# EAGLE board panda (EAGLE 9.6.2)
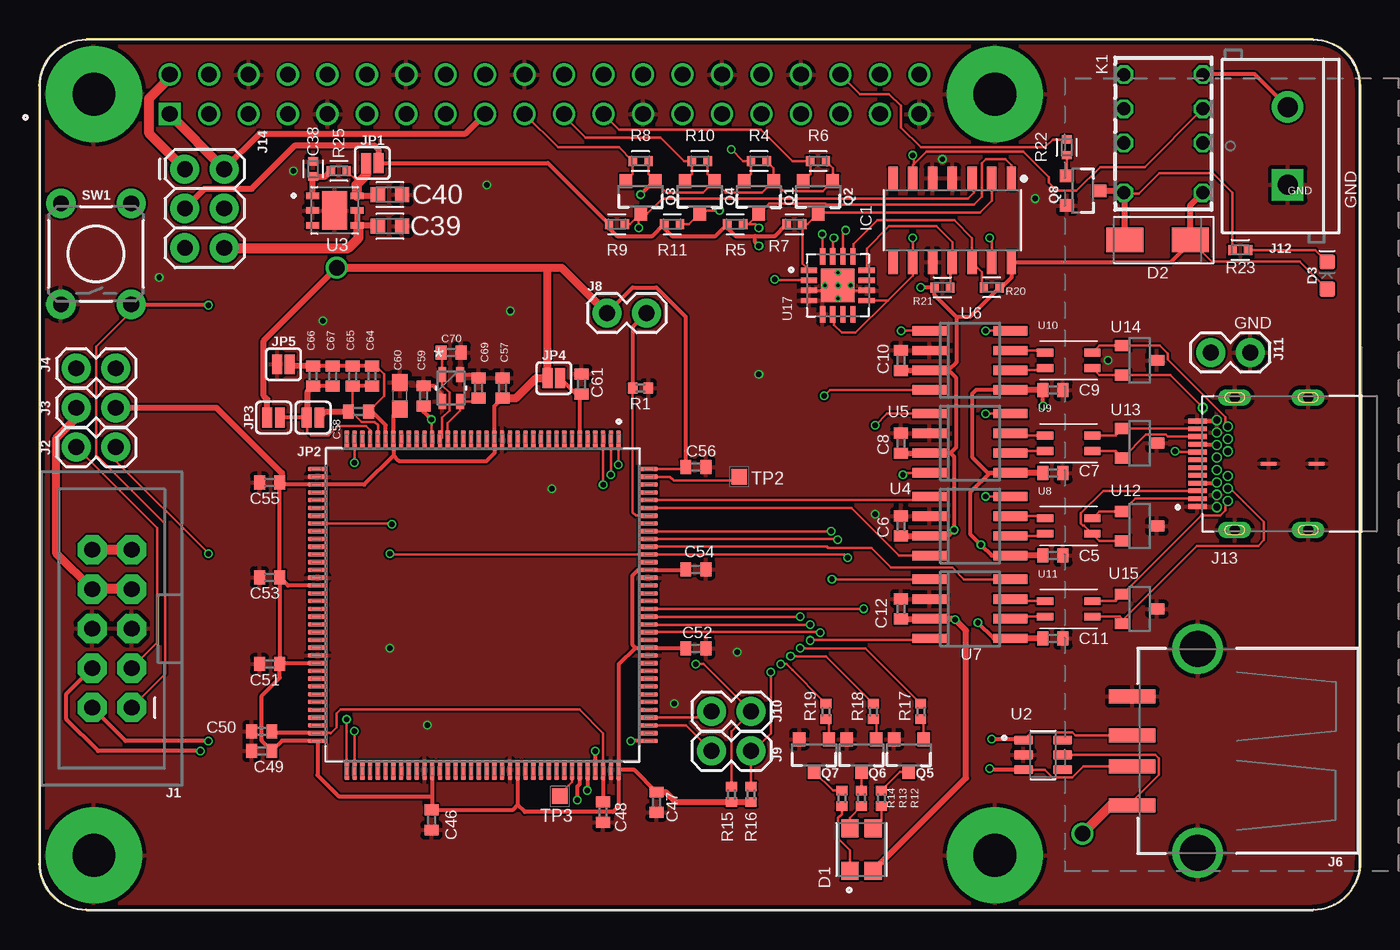
[diagram p0: board, top side]
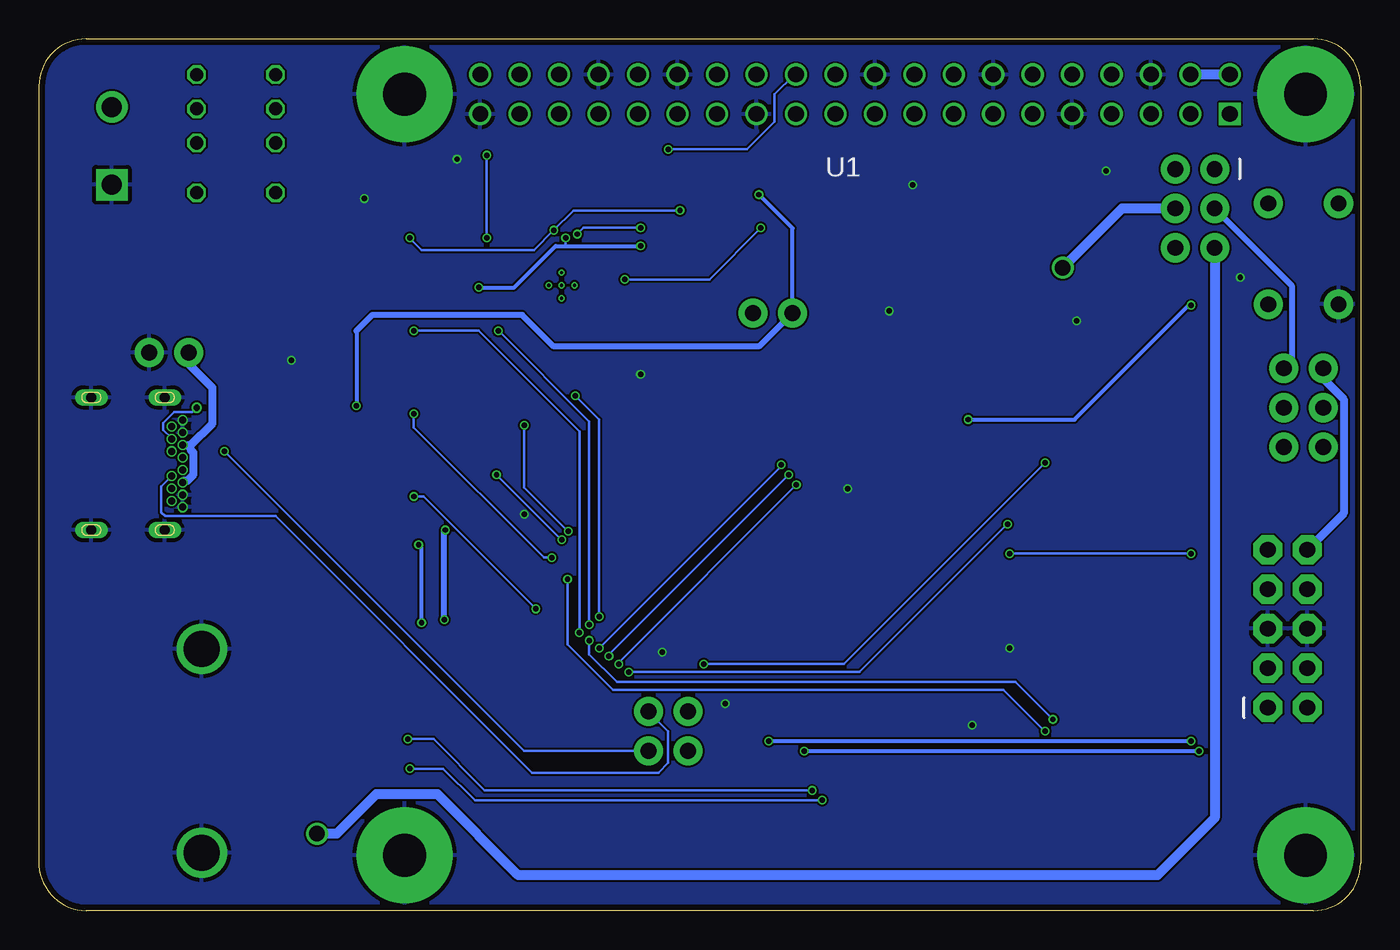
[diagram p1: board, bottom side, seen from below]

Size 85.09 x 56.13 mm. Coordinates in mm from the lower left corner, seen from the top.
Outline: 0,53.09 0,3.05 arc90 3.05,0 82.04,0 arc90 85.09,3.17 85.09,53.09 arc90 82.04,56.13 3.05,56.13 arc90 0,53.09
Copper layers (1*16): Top 0.035mm / dielectric 1.5mm / Bottom 0.035mm
Design rules "default *": minimum track width 6mil, minimum drill 0.1mm, track to track 5mil, track to pad 5mil, pad to pad 5mil, via to via 5mil, smd to smd 5mil, copper to edge 15mil, drill to drill 6mil, minimum pad ring 4mil, minimum via ring 4mil, stop-mask expansion 4mil, vias tented up to drill 0mil, thermal gap 10mil

## Footprints (pad centres in the part's own frame; a part is rotated, then mirrored left to right if it is on the bottom)
C0402 = smd 0.7 x 0.9: 1 -0.65,0; 2 0.65,0
CAPC1005X60 = smd 0.56 x 0.629: 1 -0.485,0; 2 0.485,0
CAPC1608X85 = smd 0.921 x 0.97: 1 -0.775,0; 2 0.775,0
C0603 = smd 1.1 x 1: 1 -0.85,0; 2 0.85,0
LED_CLV1A-FKB-CK1VW1DE1BB7C3C3 = smd 1.15 x 1.1: 1 -1.375,0.75; 2 -1.375,-0.75; 3 1.375,-0.75; 4 1.375,0.75
DIOM5226X290N = smd 2.392 x 1.565: 1 -2.108,0; 2 2.108,0
LED-0603 = smd 1 x 1: A -0.877,0; C 0.877,0
SOIC127P600X175-14N = smd 1.5 x 0.6: 1 -2.7,3.81; 2 -2.7,2.54; 3 -2.7,1.27; 4 -2.7,0; 5 -2.7,-1.27; 6 -2.7,-2.54; 7 -2.7,-3.81; 8 2.7,-3.81; 9 2.7,-2.54; 10 2.7,-1.27; 11 2.7,0; 12 2.7,1.27; 13 2.7,2.54; 14 2.7,3.81
2X5-SHROUDED-NS = drill 1.016 pad 1.88 octagon: 1 -1.27,5.08; 2 1.27,5.08; 3 -1.27,2.54; 4 1.27,2.54; 5 -1.27,0; 6 1.27,0; 7 -1.27,-2.54; 8 1.27,-2.54; 9 -1.27,-5.08; 10 1.27,-5.08
1X02 = drill 1.016 pad 1.88: 1 0,0; 2 2.54,0
USB-A-S-SILK-FEMALE = smd 3 x 0.9: D+ 7.212,-1; D- 7.212,1; GND 7.212,-3.5; VBUS 7.212,3.5 | drill 2.311: SHLD1 3,-6.566; SHLD2 3,6.566
SCREWTERMINAL-5MM-2 = drill 1.3 pad 2.032 square: 1 0,0 | drill 1.3 pad 2.032: 2 5,0
BELFUSE_SS-52400-003 = smd 0.3 x 1.2: A1 -2.75,7.13; A2 -2.25,7.13; A3 -1.75,7.13; A4 -1.25,7.13; A5 -0.75,7.13; A6 -0.25,7.13; A7 0.25,7.13; A8 0.75,7.13; A9 1.25,7.13; A10 1.75,7.13; A11 2.25,7.13; A12 2.75,7.13 | drill 0.45 pad 0.65: B1 2.8,5.88; B2 2.4,5.17; B3 1.6,5.17; B4 1.2,5.88; B5 0.8,5.17; B6 0.4,5.88; B7 -0.4,5.88; B8 -0.8,5.17; B9 -1.2,5.88; B10 -1.6,5.17; B11 -2.4,5.17; B12 -2.8,5.88; G1 2,5.88; G2 -2,5.88 | smd 0.2 x 1: G3 0,2.55; G4 0,-0.55 | drill 0.65 pad 1.05 long: S1 -4.27,4.73; S2 4.27,4.73; S3 -4.27,0; S4 4.27,0
2X3 = drill 1.016 pad 1.88: 1 0,0; 2 0,2.54; 3 2.54,0; 4 2.54,2.54; 5 5.08,0; 6 5.08,2.54
SMT-JUMPER_2_NC_PASTE_SILK = smd 0.635 x 1.27: 1 -0.406,0; 2 0.406,0
G6K-2P-Y = drill 0.85 octagon: 1 0,-2.54; 2 3.2,-2.54; 3 5.4,-2.54; 4 7.6,-2.54; 5 7.6,2.54; 6 5.4,2.54; 7 3.2,2.54; 8 0,2.54
SOT23-3 = smd 0.8 x 0.9: 1 -0.95,-1; 2 0.95,-1; 3 0,1.1
R0402 = smd 0.6 x 0.7: 1 -0.5,0; 2 0.5,0
RESC1005X40 = smd 0.535 x 0.644: 1 -0.507,0; 2 0.507,0
TACTILE_SWITCH_PTH_6.0MM = drill 1.016 pad 1.88: 1 -3.251,2.261; 2 3.251,2.261; 3 -3.251,-2.261; 4 3.251,-2.261
TESTPOINT_SMD-10SN = smd 1 x 1: TP 0,0
MODULE_RASPBERRYPI4_4GB = drill 1.016 square: 1 24.148,-1.256 | drill 1.016: 2 24.148,1.284; 3 21.608,-1.256; 4 21.608,1.284; 5 19.068,-1.256; 6 19.068,1.284; 7 16.528,-1.256; 8 16.528,1.284; 9 13.988,-1.256; 10 13.988,1.284; 11 11.448,-1.256; 12 11.448,1.284; 13 8.908,-1.256; 14 8.908,1.284; 15 6.368,-1.256; 16 6.368,1.284; 17 3.828,-1.256; 18 3.828,1.284; 19 1.288,-1.256; 20 1.288,1.284; 21 -1.252,-1.256; 22 -1.252,1.284; 23 -3.792,-1.256; 24 -3.792,1.284; 25 -6.332,-1.256; 26 -6.332,1.284; 27 -8.872,-1.256; 28 -8.872,1.284; 29 -11.412,-1.256; 30 -11.412,1.284; 31 -13.952,-1.256; 32 -13.952,1.284; 33 -16.492,-1.256; 34 -16.492,1.284; 35 -19.032,-1.256; 36 -19.032,1.284; 37 -21.572,-1.256; 38 -21.572,1.284; 39 -24.112,-1.256; 40 -24.112,1.284 | drill 2.75 pad 6.2: S1 29.018,0.014; S2 -28.982,0.014; S3 -28.982,-48.986; S4 29.018,-48.986
SOT95P280X145-6N = smd 1.21 x 0.58: 1 -1.255,0.95; 2 -1.255,0; 3 -1.255,-0.95; 4 1.255,-0.95; 5 1.255,0; 6 1.255,0.95
SON95P300X300X100-7N = smd 0.84 x 0.42: 1 -1.435,0.95; 2 -1.435,0; 3 -1.435,-0.95; 4 1.435,-0.95; 5 1.435,0; 6 1.435,0.95 | smd 1.6 x 2.5: 7 0,0
SOIC8 = smd 0.6 x 2.2: 1 -1.905,-2.6; 2 -0.635,-2.6; 3 0.635,-2.6; 4 1.905,-2.6; 5 1.905,2.6; 6 0.635,2.6; 7 -0.635,2.6; 8 -1.905,2.6
ACT1210-101-2P-TL = smd 1.05 x 0.5: 1 -1.525,0.5; 2 -1.525,-0.5; 3 1.525,-0.5; 4 1.525,0.5
DBZ_R-PDSO-G3 = smd 0.7 x 1: 1 -0.95,-1.1; 2 0.95,-1.1; 3 0,1.1
LQFP-144 = smd 1.26 x 0.3: 1 -10.63,8.75; 2 -10.63,8.25; 3 -10.63,7.75; 4 -10.63,7.25; 5 -10.63,6.75; 6 -10.63,6.25; 7 -10.63,5.75; 8 -10.63,5.25; 9 -10.63,4.75; 10 -10.63,4.25; 11 -10.63,3.75; 12 -10.63,3.25; 13 -10.63,2.75; 14 -10.63,2.25; 15 -10.63,1.75; 16 -10.63,1.25; 17 -10.63,0.75; 18 -10.63,0.25; 19 -10.63,-0.25; 20 -10.63,-0.75; 21 -10.63,-1.25; 22 -10.63,-1.75; 23 -10.63,-2.25; 24 -10.63,-2.75; 25 -10.63,-3.25; 26 -10.63,-3.75; 27 -10.63,-4.25; 28 -10.63,-4.75; 29 -10.63,-5.25; 30 -10.63,-5.75; 31 -10.63,-6.25; 32 -10.63,-6.75; 33 -10.63,-7.25; 34 -10.63,-7.75; 35 -10.63,-8.25; 36 -10.63,-8.75; 73 10.63,-8.75; 74 10.63,-8.25; 75 10.63,-7.75; 76 10.63,-7.25; 77 10.63,-6.75; 78 10.63,-6.25; 79 10.63,-5.75; 80 10.63,-5.25; 81 10.63,-4.75; 82 10.63,-4.25; 83 10.63,-3.75; 84 10.63,-3.25; 85 10.63,-2.75; 86 10.63,-2.25; 87 10.63,-1.75; 88 10.63,-1.25; 89 10.63,-0.75; 90 10.63,-0.25; 91 10.63,0.25; 92 10.63,0.75; 93 10.63,1.25; 94 10.63,1.75; 95 10.63,2.25; 96 10.63,2.75; 97 10.63,3.25; 98 10.63,3.75; 99 10.63,4.25; 100 10.63,4.75; 101 10.63,5.25; 102 10.63,5.75; 103 10.63,6.25; 104 10.63,6.75; 105 10.63,7.25; 106 10.63,7.75; 107 10.63,8.25; 108 10.63,8.75 | smd 0.3 x 1.26: 37 -8.75,-10.63; 38 -8.25,-10.63; 39 -7.75,-10.63; 40 -7.25,-10.63; 41 -6.75,-10.63; 42 -6.25,-10.63; 43 -5.75,-10.63; 44 -5.25,-10.63; 45 -4.75,-10.63; 46 -4.25,-10.63; 47 -3.75,-10.63; 48 -3.25,-10.63; 49 -2.75,-10.63; 50 -2.25,-10.63; 51 -1.75,-10.63; 52 -1.25,-10.63; 53 -0.75,-10.63; 54 -0.25,-10.63; 55 0.25,-10.63; 56 0.75,-10.63; 57 1.25,-10.63; 58 1.75,-10.63; 59 2.25,-10.63; 60 2.75,-10.63; 61 3.25,-10.63; 62 3.75,-10.63; 63 4.25,-10.63; 64 4.75,-10.63; 65 5.25,-10.63; 66 5.75,-10.63; 67 6.25,-10.63; 68 6.75,-10.63; 69 7.25,-10.63; 70 7.75,-10.63; 71 8.25,-10.63; 72 8.75,-10.63; 109 8.75,10.63; 110 8.25,10.63; 111 7.75,10.63; 112 7.25,10.63; 113 6.75,10.63; 114 6.25,10.63; 115 5.75,10.63; 116 5.25,10.63; 117 4.75,10.63; 118 4.25,10.63; 119 3.75,10.63; 120 3.25,10.63; 121 2.75,10.63; 122 2.25,10.63; 123 1.75,10.63; 124 1.25,10.63; 125 0.75,10.63; 126 0.25,10.63; 127 -0.25,10.63; 128 -0.75,10.63; 129 -1.25,10.63; 130 -1.75,10.63; 131 -2.25,10.63; 132 -2.75,10.63; 133 -3.25,10.63; 134 -3.75,10.63; 135 -4.25,10.63; 136 -4.75,10.63; 137 -5.25,10.63; 138 -5.75,10.63; 139 -6.25,10.63; 140 -6.75,10.63; 141 -7.25,10.63; 142 -7.75,10.63; 143 -8.25,10.63; 144 -8.75,10.63
QFN65P400X400X100-17N = smd 1.05 x 0.34: 1 -1.86,0.975; 2 -1.86,0.325; 3 -1.86,-0.325; 4 -1.86,-0.975; 9 1.86,-0.975; 10 1.86,-0.325; 11 1.86,0.325; 12 1.86,0.975 | smd 0.34 x 1.05: 5 -0.975,-1.86; 6 -0.325,-1.86; 7 0.325,-1.86; 8 0.975,-1.86; 13 0.975,1.86; 14 0.325,1.86; 15 -0.325,1.86; 16 -0.975,1.86 | smd 2.16 x 2.16: 17 0,0 | drill 0.2 pad 0.3: 18 0,0; 19 -0.83,0; 20 0.83,0; 21 0,0.83; 22 0,-0.83
NX2016SA_NDK = smd 0.508 x 0.965: 1 -0.572,0.876; 2 -0.572,-0.876; 3 0.572,-0.876; 4 0.572,0.876

## Placement (x,y rotation side)
C5  0.1uF  [C0402]  65.28,22.86 0 top
C6  0.1uF  [C0402]  55.5,24.77 90 top
C7  0.1uF  [C0402]  65.28,28.19 0 top
C8  0.1uF  [C0402]  55.5,30.1 90 top
C9  0.1uF  [C0402]  65.28,33.53 0 top
C10  0.1uF  [C0402]  55.5,35.43 90 top
C11  0.1uF  [C0402]  65.28,17.53 0 top
C12  0.1uF  [C0402]  55.5,19.43 90 top
C38  100nF  [CAPC1005X60]  17.65,47.75 90 top
C39  4.7uF  [CAPC1608X85]  22.61,44.07 0 top
C40  4.7uF  [CAPC1608X85]  22.61,46.1 0 top
C46  100nF  [C0402]  25.27,5.84 270 top
C47  100nF  [C0402]  39.75,6.98 270 top
C48  1uF  [C0402]  36.32,6.35 270 top
C49  100nF  [C0402]  14.35,10.29 180 top
C50  1uF  [C0402]  14.35,11.56 180 top
C51  100nF  [C0402]  14.86,15.88 180 top
C52  100nF  [C0402]  42.29,16.89 0 top
C53  100nF  [C0402]  14.86,21.46 180 top
C54  100nF  [C0402]  42.29,21.97 0 top
C55  100nF  [C0402]  14.86,27.56 180 top
C56  100nF  [C0402]  42.29,28.58 0 top
C57  100nF  [C0402]  29.84,33.66 90 top
C58  100nF  [C0402]  20.57,32.13 0 top
C59  100nF  [C0402]  24.77,33.15 90 top
C60  4.7uF  [C0603]  23.24,33.15 90 top
C61  1uF  [C0402]  34.92,33.91 90 top
C64  1uF  [C0402]  21.46,34.42 90 top
C65  100nF  [C0402]  20.19,34.42 90 top
C66  1uF  [C0402]  17.65,34.42 90 top
C67  100nF  [C0402]  18.92,34.42 90 top
C69  5.6p  [C0402]  28.32,33.66 90 top
C70  5.6p  [C0402]  26.54,35.94 0 top
D1  CLV1A-FKB-CK1VW1DE1BB7C3C3  [LED_CLV1A-FKB-CK1VW1DE1BB7C3C3]  52.96,3.94 90 top
D2  MRA4003T3G  [DIOM5226X290N]  72.01,43.18 180 top
D3  ACC_EN  [LED-0603]  82.93,40.89 90 top
IC1  MCP4261-103E/SL  [SOIC127P600X175-14N]  58.8,44.45 270 top
J1  ST-Link  [2X5-SHROUDED-NS]  4.7,18.16 180 top
J2  SWIM  [1X02]  2.41,29.84 0 top
J3  ST_3.3V  [1X02]  2.41,32.38 0 top
J4  ST_5V  [1X02]  2.41,34.92 0 top
J6  USB_A_SMT_FEMALE  [USB-A-S-SILK-FEMALE]  77.6,10.29 180 top
J8  Boot  [1X02]  36.58,38.48 0 top
J9  SBU1  [1X02]  43.31,10.29 0 top
J10  SBU2  [1X02]  43.31,12.83 0 top
J11  VIN  [1X02]  77.98,35.94 180 top
J12  ACC  [SCREWTERMINAL-5MM-2]  80.39,46.74 90 top
J13  SS-52400-003  [BELFUSE_SS-52400-003]  81.71,28.78 90 top
J14  Power Select  [2X3]  9.4,47.75 270 top
JP1  5V for 3v3 Reg  [SMT-JUMPER_2_NC_PASTE_SILK]  21.46,48.13 0 top
JP2  VREF+  [SMT-JUMPER_2_NC_PASTE_SILK]  17.65,31.75 0 top
JP3  VDDA  [SMT-JUMPER_2_NC_PASTE_SILK]  15.11,31.75 0 top
JP4  VBAT  [SMT-JUMPER_2_NC_PASTE_SILK]  33.15,34.29 0 top
JP5  AGND  [SMT-JUMPER_2_NC_PASTE_SILK]  15.75,35.18 0 top
K1  G6K-2P-Y  [G6K-2P-Y]  72.39,46.23 90 top
Q1  220mA/50V/3.5Ω  [SOT23-3]  46.35,45.97 180 top
Q2  220mA/50V/3.5Ω  [SOT23-3]  50.16,45.97 180 top
Q3  220mA/50V/3.5Ω  [SOT23-3]  38.73,45.97 180 top
Q4  220mA/50V/3.5Ω  [SOT23-3]  42.55,45.97 180 top
Q5  220mA/50V/3.5Ω  [SOT23-3]  56.01,10.03 180 top
Q6  220mA/50V/3.5Ω  [SOT23-3]  52.96,10.03 180 top
Q7  220mA/50V/3.5Ω  [SOT23-3]  49.91,10.03 180 top
Q8  220mA/50V/3.5Ω  [SOT23-3]  67.18,46.35 270 top
R1  10k  [R0402]  38.73,33.66 180 top
R4  10k  [RESC1005X40]  46.35,48.26 0 top
R5  10k  [RESC1005X40]  44.83,44.2 180 top
R6  10k  [RESC1005X40]  50.16,48.26 0 top
R7  10k  [RESC1005X40]  48.64,44.2 180 top
R8  10k  [RESC1005X40]  38.73,48.26 0 top
R9  10k  [RESC1005X40]  37.21,44.2 180 top
R10  10k  [RESC1005X40]  42.55,48.26 0 top
R11  10k  [RESC1005X40]  40.77,44.2 180 top
R12  90  [R0402]  54.23,7.24 90 top
R13  90  [R0402]  52.96,7.24 90 top
R14  150  [R0402]  51.69,7.24 90 top
R15  10k  [R0402]  44.58,7.49 270 top
R16  10k  [R0402]  45.85,7.49 270 top
R17  100  [R0402]  56.77,12.83 90 top
R18  100  [R0402]  53.72,12.83 90 top
R19  100  [R0402]  50.67,12.83 90 top
R20  10k  [RESC1005X40]  61.34,40.13 0 top
R21  10k  [RESC1005X40]  58.17,40.13 180 top
R22  100  [RESC1005X40]  66.17,49.15 90 top
R23  220  [RESC1005X40]  77.34,42.55 180 top
R25  10k  [RESC1005X40]  19.3,47.62 0 top
SW1  Reset  [TACTILE_SWITCH_PTH_6.0MM]  3.68,42.29 90 top
TP2  PDR_ON  [TESTPOINT_SMD-10SN]  45.09,27.94 0 top
TP3  USB_ID  [TESTPOINT_SMD-10SN]  33.53,7.37 0 top
U1  RASPBERRYPI4_4GB  [MODULE_RASPBERRYPI4_4GB]  32.56,52.55 0 bottom
U2  USBLC6-4SC6Y  [SOT95P280X145-6N]  64.64,10.03 0 top
U3  ST1L05CPU33R  [SON95P300X300X100-7N]  19.05,45.09 0 top
U4  TLE9251VSJXUMA1  [SOIC8]  59.94,24.77 270 top
U5  TLE9251VSJXUMA1  [SOIC8]  59.94,30.1 270 top
U6  TLE9251VSJXUMA1  [SOIC8]  59.94,35.43 270 top
U7  TLE9251VSJXUMA1  [SOIC8]  59.94,19.43 270 top
U8  ACT1210D  [ACT1210-101-2P-TL]  66.29,24.77 0 top
U9  ACT1210D  [ACT1210-101-2P-TL]  66.29,30.1 0 top
U10  ACT1210D  [ACT1210-101-2P-TL]  66.29,35.43 0 top
U11  ACT1210D  [ACT1210-101-2P-TL]  66.29,19.43 0 top
U12  PESD2CANFD27V-T  [DBZ_R-PDSO-G3]  70.87,24.77 270 top
U13  PESD2CANFD27V-T  [DBZ_R-PDSO-G3]  70.87,30.1 270 top
U14  PESD2CANFD27V-T  [DBZ_R-PDSO-G3]  70.87,35.43 270 top
U15  PESD2CANFD27V-T  [DBZ_R-PDSO-G3]  70.87,19.43 270 top
U16  STM32H723ZGT  [LQFP-144]  28.57,19.69 270 top
U17  MCP4261-103E/ML  [QFN65P400X400X100-17N]  51.44,40.26 0 top
X1  NX2016SA-32MHZ-EXS00A-CS06654  [NX2016SA_NDK]  26.54,33.66 0 top

## Library data of the parts
C5-C12 C46-C61 C64-C67 C69 C70 = rcl; SPICEPREFIX: C
C38-C40 = Capacitor; CATEGORY: Capacitor
D1 = CLV1A-FKB-CK1VW1DE1BB7C3C3; AVAILABILITY: In Stock; DESCRIPTION: Red, Green, Blue (RGB) 622nm Red, 528nm Green, 468nm Blue LED Indication - Discrete 2V Red, 3.2V Green, 3.2V Blue 4-PLCC; MF: Cree Inc.; MP: CLV1A-FKB-CK1VW1DE1BB7C3C3; PACKAGE: PLCC-4 Cree Inc.; PRICE: None; PURCHASE-URL: https://pricing.snapeda.com/search/part/CLV1A-FKB-CK1VW1DE1BB7C3C3/?ref=eda
D2 = Diode; CATEGORY: Diode; DESCRIPTION: DIODE GEN PURP 300V 1A SMA; MANUFACTURER: ON Semiconductor; SUB-CATEGORY: Rectifier
D3 = SparkFun-LED; PROD_ID: DIO-00819
IC1 = IC_Data-Conversion; CATEGORY: IC_Data-Conversion; MANUFACTURER: Microchip Technology; MPN: MCP4261-103E/SL; OPERATING_TEMPERATURE: -40°C ~ 125°C; PART_STATUS: ACTIVE; ROHS_COMPLIANT: COMPLIANT; SERIES: MCP42X; SUB_CATEGORY: Digital Potentiometer; THERMALLOSS: 0.4 W
J1 = SparkFun-Connectors; PROD_ID: CONN-08671; SF_ID: PRT-08506
J2-J4 J8-J11 = SparkFun-Connectors
J6 = SparkFun-Connectors; PROD_ID: CONN-09520; SF_ID: PRT-09011
J12 = SparkFun-Connectors; SF_SKU: PRT-08432
J13 = SS-52400-003; AVAILABILITY: In Stock; DESCRIPTION: USB Type-C Connector | 1 Port | Right Angle Receptacle | Shielded | 0.063[1.60mm]; MF: Stewart Connector; MP: SS-52400-003; PACKAGE: None; PRICE: None; PURCHASE-URL: https://pricing.snapeda.com/search/part/SS-52400-003/?ref=eda
J14 = SparkFun-Connectors; PROD_ID: CONN-11566
JP1-JP5 = SparkFun-Jumpers
K1 = relay; MF: OMRON COMPONENTS USA; MPN: G6K-2P-Y DC12; OC_FARNELL: 3937276; OC_NEWARK: 34C3464
Q1-Q8 = SparkFun-DiscreteSemi; PROD_ID: TRANS-00830
R1 R12-R19 = rcl; SPICEPREFIX: R
R4-R11 R20-R23 R25 = Resistor; CATEGORY: Resistor; SUB-CATEGORY: Fixed
SW1 = SparkFun-Switches; PROD_ID: SWCH-08441; SF_SKU: COM-00097
TP2 TP3 = LinkedLibrary52101; BOM: EXCLUDE
U1 = RASPBERRYPI4_4GB; AVAILABILITY: In Stock; DESCRIPTION: BCM2711 Raspberry Pi 4 Model B 4GB - ARM® Cortex®-A72 MPU Embedded Evaluation Board; MF: Raspberry Pi; MP: RASPBERRY PI 4B/4GB; PACKAGE: None; PRICE: None; PURCHASE-URL: https://pricing.snapeda.com/search/part/RASPBERRY PI 4B/4GB/?ref=eda
U2 = USBLC6-4SC6Y; AVAILABILITY: In Stock; DESCRIPTION: 17V Clamp 5A (8/20µs) Ipp Tvs Diode Surface Mount SOT-23-6; MF: STMicroelectronics; MP: USBLC6-4SC6Y; PACKAGE: SOT-23-6 STMicroelectronics; PRICE: None; PURCHASE-URL: https://pricing.snapeda.com/search/part/USBLC6-4SC6Y/?ref=eda
U3 = ST1L05CPU33R; AVAILABILITY: In Stock; DESCRIPTION: Linear Voltage Regulator IC Positive Fixed 1 Output 1.3A 6-DFN (3x3); MF: STMicroelectronics; MP: ST1L05CPU33R; PACKAGE: DFN-6 STMicroelectronics; PRICE: None; PURCHASE-URL: https://pricing.snapeda.com/search/part/ST1L05CPU33R/?ref=eda
U4-U16 = circles
U17 = MCP4261-103E_ML; AVAILABILITY: In Stock; DESCRIPTION: Digital Potentiometer 10kOhm 256POS Non-Volatile Linear Automotive 16-Pin QFN EP Tube; MF: Microchip; MP: MCP4261-103E/ML; PACKAGE: QFN-16 Microchip; PRICE: None; PURCHASE-URL: https://pricing.snapeda.com/search/part/MCP4261-103E/ML/?ref=eda
X1 = circles; COPYRIGHT: Copyright (C) 2022 Ultra Librarian. All rights reserved.; MANUFACTURER_PART_NUMBER: NX2016SA-32MHZ-EXS00A-CS06654; MFR_NAME: NDK

## Nets
3V3_BRD: C39.1 J14.6 U3.4 U3.5
3V3_PI: J14.2 U1.1 U1.17
5V_PI: J14.1 U1.2 U1.4
5V_USB: J6.VBUS J14.5 U2.5
+3V3: C5.1 C7.1 C9.1 C11.1 C46.1 C47.1 C49.1 C51.1 C52.1 C53.1 C54.1 C55.1 C56.1 C57.1 C60.1 J3.2 J8.1 J14.4 JP3.1 JP4.1 Q1.1 Q2.1 Q3.1 Q4.1 R4.2 R6.2 R8.2 R10.2 R15.2 R16.2 U4.5 U5.5 U6.5 U7.5 U16.17 U16.30 U16.39 U16.52 U16.62 U16.72 U16.84 U16.95 U16.108 U16.121 U16.131 U16.144
+5V: C6.1 C8.1 C10.1 C12.1 D1.2 D2.1 D3.A IC1.14 J4.2 J14.3 JP1.2 K1.1 R5.2 R7.2 R9.2 R11.2 R20.2 R21.2 U4.3 U5.3 U6.3 U7.3 U17.15
AGND: C58.2 C64.2 C65.2 C66.2 C67.2 JP5.2 U16.31
BOOT0: J8.2 R1.2 U16.138
CAN0_H: J13.A2 U8.4 U12.1
CAN0_L: J13.A3 U8.3 U12.2
CAN1_H: J13.A11 U9.4 U13.1
CAN1_L: J13.A10 U9.3 U13.2
CAN2_H: J13.B2 U10.4 U14.1
CAN2_L: J13.B3 U10.3 U14.2
CAN3_H: J13.B11 U11.4 U15.1
CAN3_L: J13.B10 U11.3 U15.2
CAN_RXD_1: U4.4 U16.139
CAN_RXD_2: U5.4 U16.135
CAN_RXD_3: U6.4 U16.125
CAN_RXD_4: U7.4 U16.73
CAN_STBY_1: U4.8 U16.126
CAN_STBY_2: J2.2 U5.8 U16.133
CAN_STBY_3: U6.8 U16.123
CAN_STBY_4: U7.8 U16.134
CAN_TXD_1: U4.1 U16.140
CAN_TXD_2: U5.1 U16.136
CAN_TXD_3: U6.1 U16.124
CAN_TXD_4: U7.1 U16.74
GND: C5.2 C6.2 C7.2 C8.2 C9.2 C10.2 C11.2 C12.2 C38.2 C39.2 C40.2 C46.2 C47.2 C48.2 C49.2 C50.2 C51.2 C52.2 C53.2 C54.2 C55.2 C56.2 C57.2 C59.2 C60.2 C61.2 C69.2 C70.2 IC1.4 IC1.5 IC1.10 J1.5 J1.6 J6.GND J6.SHLD1 J6.SHLD2 J11.1 J12.1 J13.A1 J13.A12 J13.B1 J13.B12 J13.G1 J13.G2 J13.G3 J13.G4 J13.S1 J13.S2 J13.S3 J13.S4 JP5.1 Q5.2 Q6.2 Q7.2 Q8.2 R1.1 SW1.1 U1.6 U1.9 U1.14 U1.20 U1.25 U1.30 U1.34 U1.39 U1.S1 U1.S2 U1.S3 U1.S4 U2.2 U3.2 U3.7 U4.2 U5.2 U6.2 U7.2 U12.3 U13.3 U14.3 U15.3 U16.16 U16.38 U16.51 U16.61 U16.83 U16.94 U16.107 U16.120 U16.130 U17.3 U17.4 U17.5 U17.10 U17.17 X1.2 X1.4
LED_BLUE: R17.2 U16.1
LED_GREEN: R18.2 U16.2
LED_RED: R19.2 U16.3
N$1: U4.7 U8.1
N$2: U4.6 U8.2
N$3: U5.7 U9.1
N$4: U5.6 U9.2
N$5: U6.7 U10.1
N$6: U6.6 U10.2
N$7: U7.7 U11.1
N$8: U7.6 U11.2
N$9: J1.7 J1.8 J3.1
N$10: J12.2 K1.4
N$11: J1.9 J1.10 J4.1
N$12: Q5.3 R12.2
N$13: D1.3 R12.1
N$14: D1.4 R13.1
N$15: D1.1 R14.1
N$16: Q6.3 R13.2
N$17: Q7.3 R14.2
N$18: TP2.TP U16.143
N$19: Q5.1 R17.1
N$20: Q6.1 R18.1
N$21: Q7.1 R19.1
N$22: IC1.12 R20.1 U17.13
N$23: IC1.11 R21.1 U17.12
N$24: D3.C R23.1
N$25: D2.2 K1.8 Q8.3 R23.2
N$26: Q8.1 R22.1
N$27: C38.1 R25.1 U3.1
N$28: C40.1 JP1.1 R25.2 U3.6
NRST: C59.1 J1.1 SW1.3 U16.25
OBD_SBU1: J9.2 J13.A8 R16.1 U16.44
OBD_SBU1_RELAY: J9.1 U16.111
OBD_SBU2: J10.2 J13.B8 R15.1 U16.35
OBD_SBU2_RELAY: J10.1 U16.112
PH0-OSC_IN: C69.1 U16.23 X1.3
PH1-OSC_OUT: C70.1 U16.24 X1.1
R_EN: R22.2 U1.36
R_OUT: IC1.6 IC1.9 K1.3 U17.6 U17.9
SPI_CLK_HV: IC1.2 Q2.3 R7.1 U17.1
SPI_CLK_LV: Q2.2 R6.1 U1.23
SPI_CS_HV: IC1.1 Q1.3 R5.1 U17.16
SPI_CS_LV: Q1.2 R4.1 U1.24
SPI_MISO_HV: IC1.13 Q4.3 R11.1 U17.14
SPI_MISO_LV: Q4.2 R10.1 U1.21
SPI_MOSI_HV: IC1.3 Q3.3 R9.1 U17.2
SPI_MOSI_LV: Q3.2 R8.1 U1.19
SWCLK: J1.2 U16.109
SWDIO: J1.4 U16.105
SWO-SWIM: J1.3 J2.1
USB_DN: J6.D- U2.3 U16.103
USB_DP: J6.D+ U2.1 U16.104
USB_ID: TP3.TP U16.102
USB_LOAD_SWITCH: U16.75
VBAT: C61.1 JP4.2 U16.6
VCAP: C48.1 C50.1 U16.71 U16.106
VDDA: C66.1 C67.1 JP2.1 JP3.2 U16.33
VIN: J11.2 J13.A4 J13.A9 J13.B4 J13.B9
VREFP: C58.1 C64.1 C65.1 JP2.2 U16.32
X728_BOOT: U1.32
X728_BUTTON: U1.37
X728_BUZZER: U1.38
X728_PLD: U1.31
X728_SHUTDOWN: U1.29

## Tracks (layer width: path | path; a pad name or v marks a point on that pad's centre or on a via)
3V3_BRD
  Top 0.381: C39.1 21.77,44.13 U3.4 U3.5
  Top 0.635: J14.6 19.94,42.67 20.57,43.31 20.57,44.05 U3.4
3V3_PI
  Top 0.381: 11.94,47.77 14.2,50.04 27.48,50.04 U1.17
  Top 0.635: 11.94,47.77 J14.2 8.41,51.27 U1.1
5V_PI
  Top 0.635: J14.1 7.11,50.04 7.11,52.32 8.41,53.63 U1.2
  Bottom 0.635: U1.2 U1.4
5V_USB  (via drill 1)
  Top 0.152: U2.5 71.88,10.03 72.09,9.82 72.09,8.75 70.39,7.05 J6.VBUS
  Top 0.635: v67.18,4.95 69.02,6.79 J6.VBUS
  Bottom 0.635: J14.5 9.4,5.97 13.08,2.29 54.23,2.29 59.44,7.49 63.37,7.49 65.91,4.95 v67.18,4.95
+3V3  (via drill 0.35, 1)
  Top 0.152: 41.5,28.44 U16.144 | R8.2 39.24,47.42 Q3.1 40.39,46.27 40.39,46.23 42.75,46.23 Q4.1 | R10.2 43.05,47.42 Q4.1 | R4.2 47.3,47.82 Q1.1 | R6.2 51.12,47.82 Q2.1 50.46,46.32 48.73,46.32 48.7,46.35 47.92,46.35 Q1.1 | Q4.1 44.2,46.27 44.2,46.23 46.56,46.23 Q1.1
  Top 0.254: C57.1 29.32,32.48 U16.17 29.32,29.45 28.83,28.96 23.17,28.96 22.82,29.3 | C54.1 41.6,21.94 U16.131 38.57,21.94 38.23,21.59 38.23,17.11 38.4,16.94 | C52.1 41.6,16.94 U16.121 38.4,16.94 | C47.1 38.33,9.05 U16.108 | U16.52 16.04,20.94 C53.1 | U16.39 17.91,27.44 | 17.91,27.44 15.63,27.44 C55.1 C53.1 | C53.1 C51.1 | U16.62 15.57,15.94 C51.1 | C51.1 15.51,15 14.35,13.84 14.35,10.94 C49.1 15.65,10.94 U16.72 17.95,8.72 19.3,7.37 25.32,7.37 | U16.84 25.32,7.37 | 25.32,7.37 25.32,6.54 C46.1 25.29,6.48 30.48,6.48 30.82,6.82 | U16.95 30.82,6.82 | U16.108 37.33,6.72 36.96,6.35 31.3,6.35 30.82,6.82 | U16.108 37.34,9.07 37.34,15.88 38.4,16.94 | 22.82,29.3 U16.30 22.82,31.88 C60.1 | 22.82,29.3 20.95,27.43 17.91,27.43 17.91,27.44 | U6.5 60.33,33.53 60.07,33.27 60.07,29.21 61.09,28.19 U5.5 61.21,28.19 59.94,26.92 59.94,24.26 v60.64,23.56 61.34,22.86 62.99,22.86 | U7.5 61.47,17.53 v60.45,18.54 | v38.73,46.1 39.61,46.97 Q3.1 | v64.64,32.51 64.63,32.53 C9.1 | J8.1 38.23,40.13 39.75,40.13 41.64,38.24 C56.1 41.5,28.44
  Top 0.381: C11.1 U7.5 | C5.1 62.99,22.86 U4.5 | C7.1 U5.5 | C9.1 U6.5 | R16.2 R15.2 41.01,6.99 40.37,7.63 C47.1 | J3.2 11.43,32.38 15.63,28.18 15.63,27.44 | JP3.1 14.71,32.92 14.48,33.15 14.48,36.7 v19.18,41.4
  Top 0.508: C57.1 30.72,33 32,34.29 JP4.1 32.74,41.38 32.77,41.4 | v19.18,41.4 32.77,41.4 | 32.77,41.4 33.66,41.4 J8.1
  Bottom 0.254: v60.45,18.54 60.45,23.37 v60.64,23.56 | J8.1 36.58,43.94 v38.73,46.1 | 64.64,37.34 v64.64,32.51
  Bottom 0.381: J8.1 38.73,36.32 51.94,36.32 53.98,38.35 63.63,38.35 64.64,37.34
  Bottom 0.635: J14.4 15.37,45.21 v19.18,41.4
+5V  (via drill 0.35)
  Top 0.152: D3.A 81.17,41.78 75.51,41.78 74.21,43.09 D2.1 | U17.15 51.11,43.24 v51.18,43.31
  Top 0.254: JP1.2 32.77,48.13 R9.2 36.7,43.94 37.21,43.43 39.5,43.43 R11.2 40.26,43.94 40.77,43.43 43.56,43.43 R5.2 44.32,43.94 44.83,43.43 46.1,43.43 | 46.1,43.43 47.37,43.43 R7.2 | 57.66,39.62 R21.2 v56.77,40.13 | 57.66,39.62 | 57.66,39.62 59.05,38.23 | 59.05,38.23 59.05,35.31 58.55,34.8 | 58.55,34.8 U6.3 | U5.3 58.67,29.46 | 58.67,29.46 59.05,29.84 59.05,34.29 58.55,34.8 | U4.3 58.55,24.13 v58.93,24.51 58.93,29.21 58.67,29.46 | 59.05,38.23 59.94,38.23 R20.2 61.98,40.13 62.61,40.77 IC1.14 72.86,41.75 74.21,43.09 | v46.35,42.8 46.1,43.05 46.1,43.43
  Top 0.381: D2.1 74.12,45.41 K1.1 | C10.1 U6.3 | C8.1 U5.3 | C6.1 U4.3 | C12.1 U7.3 58.93,18.8 v58.99,18.73 59.69,18.03 59.69,8.54 D1.2 | J14.3 10.67,46.48 13.72,46.48 16.51,49.28 21.59,49.28 21.87,49 JP1.2
  Bottom 0.152: v51.18,43.31 51.18,42.8
  Bottom 0.254: v56.77,40.13 54.48,40.13 51.82,42.8 51.18,42.8 v46.35,42.8
  Bottom 0.381: J14.3 4.44,40.26 4.44,35.43 J4.2 | v58.99,18.73 58.99,24.45 v58.93,24.51
AGND
  Top 0.152: C64.2 21.7,35.07 22.23,34.54 22.23,33.13 C58.2
  Top 0.254: U16.31 22.32,31.27 21.46,32.13 C58.2 | C64.2 C65.2 C67.2 C66.2
  Top 0.381: C66.2 16.27,35.07 JP5.2
BOOT0
  Top 0.152: U16.138 38.45,25.44 38.23,25.65 38.23,33.66
  Top 0.254: J8.2 38.23,37.6 R1.2 38.23,33.66
CAN0_H
  Top 0.152: J13.A2 70.58,26.53 U12.1 68.27,25.72 U8.4
CAN0_L
  Top 0.152: U12.2 68.27,23.81 U8.3 67.27,24.81 67.21,24.81 67.09,24.93 67.09,25.6 68.52,27.03 J13.A3
CAN1_H
  Top 0.152: J13.A11 69.79,31.03 U13.1 69.32,30.6 U9.4
CAN1_L
  Top 0.152: J13.A10 72.67,30.53 72.55,30.65 71.27,30.65 U13.2 | U13.2 | U9.3 69.33,29.6 U13.2
CAN2_H
  Top 0.152: J13.B2 76.36,31.36 76.36,31.8 72.67,35.49 72.67,35.87 72.15,36.38 U14.1 68.27,36.38 U10.4
CAN2_L  (via drill 0.41 pad 0.66)
  Top 0.152: v74.93,32.38 72.83,34.48 U14.2 68.27,34.48 U10.3
  Bottom 0.152: v74.93,32.38 75.21,32.11 76.36,32.11 77.07,31.4 77.07,30.96 76.54,30.43 J13.B3
CAN3_H
  Top 0.152: J13.B11 76.36,26.2 76.36,25.76 76.05,25.45 74.83,25.45 U15.1 69.32,19.93 U11.4
CAN3_L
  Top 0.152: U11.3 69.59,18.93 69.9,18.62 U15.2 69.77,18.71 74.55,23.49 78.49,23.49 78.87,23.88 78.87,25.02 76.71,27.18 J13.B10
CAN_RXD_1
  Top 0.152: U4.4 55.37,22.86 52.3,25.94 U16.139
CAN_RXD_2  (via drill 0.35)
  Top 0.152: U5.4 55.75,28.19 v55.63,28.07 | U16.135 51.38,23.94 v51.44,23.88
  Bottom 0.152: v55.63,28.07 v51.44,23.88
CAN_RXD_3  (via drill 0.35)
  Top 0.152: U16.125 v49.02,18.92 | U6.4 50.93,33.53 v50.55,33.15
  Bottom 0.152: v50.55,33.15 49.02,31.62 v49.02,18.92
CAN_RXD_4  (via drill 0.35)
  Top 0.152: v49.66,17.4 49.69,17.43 57.24,17.43 U7.4 | v19.81,12.32 19.82,12.31 U16.73
  Bottom 0.152: v49.66,17.4 49.66,16.51 47.88,14.73 22.23,14.73 v19.81,12.32
CAN_STBY_1  (via drill 0.35)
  Top 0.152: U16.126 v53.08,19.44 v53.09,19.43 | v60.96,26.67 U4.8
  Bottom 0.152: v60.96,26.67 60.33,26.67 v53.09,19.43
CAN_STBY_2  (via drill 0.35)
  Top 0.152: v52.07,22.73 51.87,22.94 U16.133 22.66,22.94 v22.61,22.99 | v60.96,32 U5.8 | v10.92,22.99 4.95,28.96 J2.2
  Bottom 0.152: v52.07,22.73 52.58,22.73 60.96,31.11 v60.96,32 | v22.61,22.99 v10.92,22.99
CAN_STBY_3  (via drill 0.35)
  Top 0.152: U16.123 50.26,17.94 v50.29,17.91 | v60.96,37.34 U6.8
  Bottom 0.152: v50.29,17.91 50.29,30.86 56.77,37.34 v60.96,37.34
CAN_STBY_4
  Top 0.152: U7.8 59.56,21.34 58.8,22.1 54.86,22.1 53.59,23.37 50.8,23.37 50.73,23.44 U16.134
CAN_TXD_1
  Top 0.152: U4.1 57.11,26.44 U16.140
CAN_TXD_2  (via drill 0.35)
  Top 0.152: U5.1 54.61,32 v53.85,31.24 | v51.02,24.42 39.22,24.42 U16.136
  Bottom 0.152: v53.85,31.24 53.85,27.25 v51.02,24.42
CAN_TXD_3  (via drill 0.35)
  Top 0.152: v49.66,18.41 39.23,18.41 U16.124 | v55.5,37.34 U6.1
  Bottom 0.152: v55.5,37.34 49.66,31.5 v49.66,18.41
CAN_TXD_4  (via drill 0.35)
  Top 0.152: U7.1 v51.05,21.34 | v20.32,11.56 v20.32,11.55 U16.74
  Bottom 0.152: v51.05,21.34 51.05,17.15 48.13,14.22 22.99,14.22 v20.32,11.56
GND  (via drill 0.35)
  Top 0.152: U17.3 50.36,39.93 50.44,39.85 50.77,39.85 51.01,40.09 51.01,40.24 51.03,40.26 51.03,40.43 51.27,40.66 51.6,40.66 51.86,40.41 51.86,40.09 | 51.86,40.09 52.1,39.85 52.43,39.85 52.51,39.93 U17.10 | U17.17 51.69,40.26 51.86,40.09
  Top 0.254: J13.A12 75.78,31.53 J13.B1 | C59.2 25.38,33.8 25.97,33.21 X1.2 | X1.4 28.09,34.53 C69.2
  other vias: 68.83,35.43 58.17,48.39 33.02,27.18 22.61,16.89 40.89,13.33 30.35,38.61 18.29,37.97 44.96,16.64 53.85,25.53 16.38,47.62 7.75,40.77 28.83,46.74 46.35,34.54 25.02,11.94 64.14,45.85
  pour Top: 0.51,56.01 84.71,56.01 84.71,0.25 0.38,0.25 0.38,55.88
  pour Bottom: 0.38,56.01 84.71,56.01 84.71,0.25 0.38,0.25
LED_BLUE  (via drill 0.35)
  Top 0.152: U16.1 37.31,30.3 v37.31,28.7 | v49.02,16.89 53.2,16.89 R17.2
  Bottom 0.152: v49.02,16.89 37.31,28.6 v37.31,28.7
LED_GREEN  (via drill 0.35)
  Top 0.152: U16.2 v36.83,28.07 | v48.39,16.38 50.66,16.38 R18.2
  Bottom 0.152: v36.83,28.07 48.39,16.51 v48.39,16.38
LED_RED  (via drill 0.35)
  Top 0.152: R19.2 50.41,13.58 48.51,15.49 48.12,15.88 v47.75,15.88 | U16.3 v36.33,27.44 v36.32,27.43
  Bottom 0.152: v36.32,27.43 47.75,16 v47.75,15.88
N$1
  Top 0.152: U4.7 64.63,25.4 U8.1
N$2
  Top 0.152: U8.2 64.63,24.13 U4.6
N$3
  Top 0.152: U9.1 62.68,30.6 U5.7
N$4
  Top 0.152: U5.6 62.68,29.6 U9.2
N$5
  Top 0.152: U6.7 64.63,36.07 U10.1
N$6
  Top 0.152: U10.2 64.63,34.8 U6.6
N$7
  Top 0.152: U11.1 62.68,19.93 U7.7
N$8
  Top 0.152: U7.6 62.68,18.93 U11.2
N$9
  Top 0.508: J3.1 2.41,31.71 1.09,30.39 1.09,23.04 J1.8
  Top 0.635: J1.7 J1.8
N$10
  Top 0.254: J12.2 78.28,53.85 74.95,53.85 K1.4
N$11
  Top 0.635: J1.9 J1.10
  Bottom 0.508: J4.1 2.41,34.25 1.09,32.93 1.09,25.58 J1.10
N$12
  Top 0.152: R12.2 55.42,8.93 Q5.3
N$13
  Top 0.152: D1.3 54.23,5.83 R12.1
N$14
  Top 0.152: D1.4 52.21,5.99 R13.1
N$15
  Top 0.152: D1.1 52.21,3.9 51.46,4.65 51.46,5.97 51.69,6.2 R14.1
N$16
  Top 0.152: R13.2 Q6.3
N$17
  Top 0.152: R14.2 51.1,7.74 Q7.3
N$18
  Top 0.152: U16.143 40.65,27.94 40.89,27.69 44.83,27.69 TP2.TP
N$19
  Top 0.152: Q5.1 56.96,12.14 R17.1
N$20
  Top 0.152: Q6.1 53.91,12.14 R18.1
N$21
  Top 0.152: Q7.1 50.86,12.14 R19.1
N$22
  Top 0.152: R20.1 60.71,40.26 60.71,41.11 IC1.12 60.07,43.31 58.93,44.45 53.98,44.45 52.45,42.93 52.45,42.16 U17.13
N$23
  Top 0.152: R21.1 58.67,41.62 IC1.11 58.8,43.05 57.78,44.07 54.74,44.07 53.3,42.63 U17.12
N$24
  Top 0.152: R23.1 82.16,42.55 D3.C
N$25
  Top 0.152: R23.2 76.83,46.23 75.56,47.5 72.14,47.5 70.81,46.18 69.9,46.18
  Top 0.381: D2.2 69.9,46.18 K1.8 69.72,46.35 Q8.3
N$26
  Top 0.152: R22.1 66.18,48.62 Q8.1
N$27
  Top 0.381: U3.1 17.61,47.23 C38.1 18.44,47.27 R25.1
N$28
  Top 0.152: R25.2 20.45,46.99 20.45,46.74
  Top 0.381: U3.6 21.77,46.03 C40.1
  Top 0.635: JP1.1 21.06,47.35 20.45,46.74 20.45,46.07 U3.6
NRST  (via drill 0.35)
  Top 0.152: U16.25 25.27,30.37 v25.27,31.62 | J1.1 8.13,15.24 8.13,24.89 3.68,29.34 3.68,36.32 6.35,38.99
  Top 0.254: C59.1 24.77,32.13 v25.27,31.62 | v10.92,38.99 6.35,38.99 5.99,38.99 SW1.3
  Bottom 0.254: v25.27,31.62 18.41,31.62 11.05,38.99 v10.92,38.99
OBD_SBU1  (via drill 0.35)
  Top 0.152: R16.1 J9.2 45.97,10.29 47.12,11.43 v47.12,15.37 | J13.A8 73.22,29.53 v73.15,29.59 | U16.44 22.69,24.94 v22.73,24.89
  Bottom 0.152: v73.15,29.59 53.85,10.29 J9.2 | v22.73,24.89 32.26,15.37 v47.12,15.37
OBD_SBU1_RELAY
  Top 0.152: U16.111 41.66,11.94 J9.1
OBD_SBU2  (via drill 0.35)
  Top 0.152: R15.1 44.58,11.56 J10.2 42.8,15.88 v42.29,15.88 | U16.35 v20.32,28.83
  Bottom 0.152: J13.B8 77.22,27.3 77.22,25.65 76.96,25.4 69.85,25.4 53.34,8.89 45.21,8.89 44.58,9.53 44.58,11.56 J10.2 | v20.32,28.83 33.27,15.88 v42.29,15.88
OBD_SBU2_RELAY
  Top 0.152: U16.112 42.91,12.44 J10.1
PH0-OSC_IN
  Top 0.152: U16.23 26.32,31.41 27.11,32.19 X1.3 28.09,32.78 C69.1
PH1-OSC_OUT
  Top 0.152: C70.1 25.97,35.86 X1.1 25.97,33.8 26.43,33.34 26.43,32.21 25.97,31.75 25.97,30.46 U16.24
R_EN
  Top 0.152: R22.2 65.28,49.66 64.77,49.15 56.77,49.15 55.5,50.42 55.5,51.82 54.74,52.58 52.85,52.58 U1.36
R_OUT  (via drill 0.35)
  Top 0.152: IC1.6 56.26,48.01 56.33,48.07 | 56.33,48.07 57.12,48.87 63.37,48.87 65.02,47.22 65.02,46.86 65.53,46.35 66.8,46.35 68.33,47.88 71.18,47.88 K1.3 | U17.6 51.18,38.33 51.18,37.72 51.69,37.21 52.58,37.21 54.65,39.28 | 54.65,39.28 56.26,40.89 IC1.9 v56.26,43.31 | U17.9 54.65,39.28 | v56.26,48.64 56.33,48.58 56.33,48.07
  Bottom 0.152: v56.26,43.31 v56.26,48.64
SPI_CLK_HV
  Top 0.152: IC1.2 61.34,45.72 60.58,44.96 50.25,44.96 Q2.3 49.49,44.2 R7.1 49.15,41.66 U17.1
SPI_CLK_LV
  Top 0.152: Q2.2 49.66,47.42 R6.1 48.51,48.26 46.48,50.29 37.36,50.29 U1.23
SPI_CS_HV  (via drill 0.35)
  Top 0.152: IC1.1 62.61,48.01 62.23,48.39 60.96,48.39 60.71,48.13 60.71,45.97 60.2,45.47 50.71,45.47 50.65,45.53 47.01,45.53 Q1.3 45.68,44.2 R5.1 46.12,44.2 v46.35,43.96 | v50.42,43.56 50.46,43.52 U17.16
  Bottom 0.152: v46.35,43.96 50.02,43.96 v50.42,43.56
SPI_CS_LV  (via drill 0.35)
  Top 0.152: Q1.2 45.85,47.42 R4.1 45.34,48.26 v44.58,49.02
  Bottom 0.152: v44.58,49.02 39.5,49.02 37.72,50.8 37.72,52.58 36.46,53.84 U1.24
SPI_MISO_HV  (via drill 0.35)
  Top 0.152: R11.1 41.87,44.2 Q4.3 42.76,45.09 v43.81,45.09 | v61.21,43.31 61.34,43.18 IC1.13 | U17.14 51.76,43.63 v51.94,43.81
  Bottom 0.152: v43.81,45.09 50.67,45.09 v51.94,43.81 53.21,42.55 60.45,42.55 v61.21,43.31
SPI_MISO_LV
  Top 0.152: Q4.2 42.04,47.42 R10.1 41.53,48.26 40.01,49.78 35.18,49.78 33.81,51.15 U1.21
SPI_MOSI_HV  (via drill 0.35)
  Top 0.152: 38.61,44.75 38.06,44.2 R9.1 | IC1.3 60.2,47.02 60.2,46.23 59.82,45.85 40.13,45.85 39.16,44.87 Q3.3 38.65,44.79 38.61,44.75 | U17.2 47.43,40.58 v47.37,40.64 | v38.61,43.96 38.61,44.75
  Bottom 0.152: v47.37,40.64 41.93,40.64 v38.61,43.96
SPI_MOSI_LV
  Top 0.152: Q3.2 38.23,47.42 R8.1 37.34,49.15 33.42,49.15 U1.19
SWCLK  (via drill 0.35)
  Top 0.254: U16.109 38.11,10.94 v38.1,10.92 | v10.92,10.92 5.59,10.92 J1.2
  Bottom 0.254: v38.1,10.92 v10.92,10.92
SWDIO  (via drill 0.35)
  Top 0.254: U16.105 v35.83,10.28 v35.81,10.29 | v10.41,10.29 3.81,10.29 1.78,12.32 1.78,13.97 J1.4
  Bottom 0.254: v35.81,10.29 v10.41,10.29
SWO-SWIM
  Top 0.152: J2.1 7.62,24.64 7.62,17.27 J1.3
USB_DN  (via drill 0.35)
  Top 0.152: J6.D- 67.24,9.29 66.55,8.59 65.25,8.59 64.76,9.08 U2.3
  Top 0.254: U2.3 61.27,9.08 v61.21,9.14 | v34.67,7.11 34.67,8 34.83,8.15 U16.103
  Bottom 0.152: v34.67,7.11 57.02,7.11 59.05,9.14 v61.21,9.14
USB_DP  (via drill 0.35)
  Top 0.152: J6.D+ 66.73,11.29 66.55,11.48 63.88,11.48 63.48,11.07 U2.1
  Top 0.254: U16.104 35.31,9.04 v35.31,7.75 | v61.34,11.05 63.45,11.05 63.48,11.07
  Bottom 0.152: v35.31,7.75 56.39,7.75 59.69,11.05 v61.34,11.05
USB_ID
  Top 0.152: U16.102 34.33,8.29 33.72,7.68 33.66,7.62 33.53,7.49 TP3.TP
VBAT
  Top 0.254: U16.6 34.83,33.16 | 34.83,33.16 C61.1 | JP4.2 34.68,33.16 34.83,33.16
VCAP
  Top 0.152: U16.71 18.79,11.44 18.8,11.43 19.18,11.81 19.18,12.7 19.43,12.95 34.8,12.95 36.33,11.43 U16.106
  Top 0.254: U16.71 15.12,11.44 C50.1 | U16.106 C48.1
VDDA
  Top 0.152: U16.33 21.32,30.95 21.08,31.2 19.26,31.2 18.67,30.61 17.53,30.61 17.27,30.86 17.27,31.77
  Top 0.254: C67.1 C66.1 | JP3.2 15.54,31.77 17.27,31.77
  Top 0.381: C66.1 17.27,33.39 17.27,31.77 JP2.1
VIN
  Top 0.254: J13.A9 75.78,30.03 J13.B4 | J13.A4 75.78,27.53 J13.B9
  Bottom 0.508: J13.B4 75.31,29.98 | 75.31,29.98 73.91,31.37 73.91,33.66 75.44,35.18 J11.2 | J13.B9 75.74,27.67 75.54,27.67 75.12,28.09 75.12,29.47 75.31,29.65 75.31,29.98
VREFP
  Top 0.152: U16.32 21.82,31.26 21.61,31.48 20.79,31.48 20.14,32.13 20.07,32.13 | C58.1 20.19,32.4 C65.1
  Top 0.254: 20.07,32.13 C58.1 | C64.1 C65.1
  Top 0.381: JP2.2 18.44,32.13 C58.1

## Text on the board
tNames: GND | GND | GND
Document: Pi | Pi | USB | Board | 5V | 3.3V | CIRCLES v1.0